# Altium PCB PCB2.PcbDoc
Units mil, origin at the board's own origin, x right, y up, seen from the top; angles counter-clockwise.
Board outline 346.68 x 220.03 mil, 2 copper layers (Top Layer, Bottom Layer); 1 components, 2 nets, 4 pads, 44 vias.
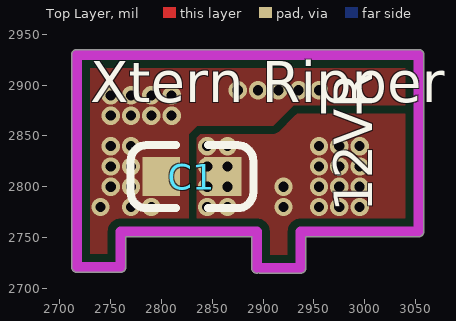
[diagram p0: Top Layer view]
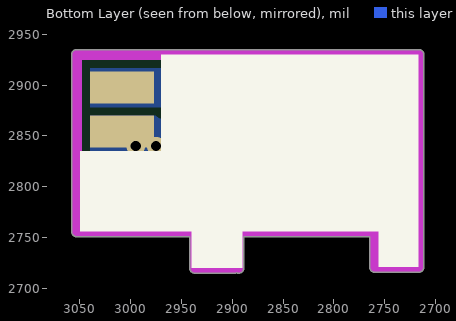
[diagram p1: Bottom Layer view, seen from below]

## Layer stack, top to bottom
Top Solder: solder mask 0.4, Solder Resist, Dk 3.5
Top Layer: signal copper 1.4
Dielectric 1: dielectric 12.6, FR-4, Dk 4.8
Bottom Layer: signal copper 1.4
Bottom Solder: solder mask 0.4, Solder Resist, Dk 3.5

## Board outline
2716.54,2715.89 2759.84,2715.89 ccw(c2759.84,2720.91) 2764.86,2720.91 2764.86,2750.89 2888.69,2750.89 2888.69,2720 ccw(c2893.7,2720) 2895.67,2715.39 ccw(c2897.64,2720) 2897.64,2714.99 2937.01,2714.99 ccw(c2937.01,2720) 2942.02,2720 2942.02,2750.89 3053.19,2750.89 ccw(c3053.19,2755.91) 3058.2,2755.91 3058.2,2930 ccw(c3053.19,2930) 3053.19,2935.01 2716.54,2935.01 ccw(c2716.54,2930) 2711.52,2930 2711.52,2720.91 ccw(c2716.54,2720.91)

## Design rules (kind name [scope] priority, off if disabled: settings)
Clearance [All] p1: gap=8
PolygonConnect [All] p1: connectstyle=Direct reliefconductorwidth=10 reliefentries=4 polygonreliefangle="90 Angle" airgapwidth=10
RoutingVias [All] p1: holewidth=28 width=50 viastyle="Through Hole" minholewidth=28 minwidth=50 maxholewidth=28 maxwidth=50
SolderMaskExpansion [All] p1: expansion=4
Width [All] p1: maxlimit=10 minlimit=10 preferedwidth=10
30 further rules are at their usual default settings.

## Components (designator, comment, footprint, x,y, rotation, side; value= is the part's Value field where it differs from the comment)
C1 "50V 1uF" 0603_C 2830,2810 r0 top

## Footprints (in the part's own frame and the unit in brackets; to place one, negate y for a bottom-side part, rotate by r counter-clockwise, add the part's x,y. Pads: shape width x height; smd on the part's side, far side on the other; paste and mask are expansions set on the pad)
0603_C [mm]
  rect 0.93x0.98 smd: 1(-0.77,0) 2(0.77,0)
  silkscreen extent -1.53,-0.79 1.54,0.79, body extent -0.8,-0.4 0.8,0.4, height 0.3

## Free pads (board coordinates)
  rect 62.99x31.5 smd far side mask+1.97: 0(3008.46,2854.33) 0(3008.46,2897.64)

## Via types
v1: diameter 18, hole 10, Top Layer to Bottom Layer, tented both sides, 44 vias

## Nets (pads, with @x,y where several pads share a name; then routed paths per layer and width w, separated by ;. In a path a pad name is that pad's centre, name@x,y a point inside that pad or via, vN(x,y) a via of type N, cw(c..) or ccw(c..) an arc to the next point about the centre after c; other vN are vias at no path point)
+12V: C1.2 pad.0@3008.46,2854.33
  other v1: 2845,2780 2865,2780 2920,2780 2955,2780 2975,2780 2995,2780 2845,2800 2865,2800 2920,2800 2955,2800 2975,2800 2995,2800 2845,2820 2865,2820 2955,2820 2975,2820 2995,2820 2845,2840 2865,2840 2955,2840 2975,2840 2995,2840
GND: C1.1 pad.0@3008.46,2897.64
  other v1: 2740,2780 2770,2780 2790,2780 2750,2800 2770,2800 2750,2820 2770,2820 2750,2840 2770,2840 2750,2870 2770,2870 2790,2870 2810,2870 2750,2890 2770,2890 2790,2890 2810,2890 2875,2895 2895,2895 2915,2895 2935,2895 2955,2895

## Polygon pours and split planes (outlines as drawn)
+12V on Bottom Layer "Component Side-No Net 1" (solid, remove dead copper, pour order 8): 2825,2755.91 2825,2870 2885,2870 2905,2890 2910,2885 3053.19,2885 3053.19,2755.91 2937.01,2755.91 2937.01,2720 2893.7,2720 2893.7,2755.91
GND on Bottom Layer "Component Side-No Net 1" (solid, remove dead copper, pour order 6): 2824.8,2750.89 2825,2751.09 2825,2850 2830,2855 2910,2855 2930,2875 3030,2875 3053.19,2875 3053.19,2930 2716.54,2930 2716.54,2720.91 2759.84,2720.91 2759.84,2755.91 2820,2755.91
+12V on Top Layer "Component Side-No Net 1" (solid, remove dead copper, pour order 12): 2835,2860 2910,2860 2930,2880 3039.93,2880 3039.93,2755.97 3040,2755.91 2937.01,2755.91 2937.01,2720 2897.64,2720 2893.7,2720 2893.7,2755.91 2835,2755.91 2826.77,2755.91 2826.77,2851.77 2835,2860
GND on Top Layer "Component Side-No Net 1" (solid, remove dead copper, pour order 10): 2826.77,2755.91 2826.77,2851.77 2835,2860 2875,2860 2910,2860 2925,2875 2930,2880 2970,2880 3053.19,2880 3053.19,2930 2716.54,2930 2716.54,2720.91 2759.84,2720.91 2759.84,2755.91

## Keep-outs
Keep-Out Layer:
  lines w10: 2893.7,2720 2893.7,2755.91 2759.84,2755.91 2759.84,2720.91 2716.54,2720.91 2716.54,2755.91 2716.54,2930 3053.19,2930 3053.19,2755.91 2937.01,2755.91 2937.01,2720 2897.64,2720

## Silkscreen, mask and mechanical layers (free items; w line width, h text height)
Top Overlay:
  text "Xtern Ripper" at 2730,2870 h68.9
  text "12VR" at 3020,2775 h65 r90
Bottom Overlay:
  rectangle: 2755,2755.91 3050,2765
  rectangle: 2716.54,2720.91 2725,2780
  rectangle: 2716.54,2780 2970,2930
  rectangle: 2935,2765 3050,2835
  rectangle: 2755,2765 2900,2825
  rectangle: 2890,2720 2940,2820
  rectangle: 2725,2720.91 2755.91,2840
Top Solder:
  rectangle: 2716.54,2720.91 2755.91,2830
  rectangle: 2897.64,2720 2938.94,2830